# Altium PCB 核心板.PcbDoc
Units mil, origin at the board's own origin, x right, y up, seen from the top; angles counter-clockwise.
Board outline 6000 x 4000 mil, 2 copper layers (Top Layer, Bottom Layer); 30 components, 44 nets, 174 pads, 0 vias.
Unrouted connection lines stored in the file: 1.
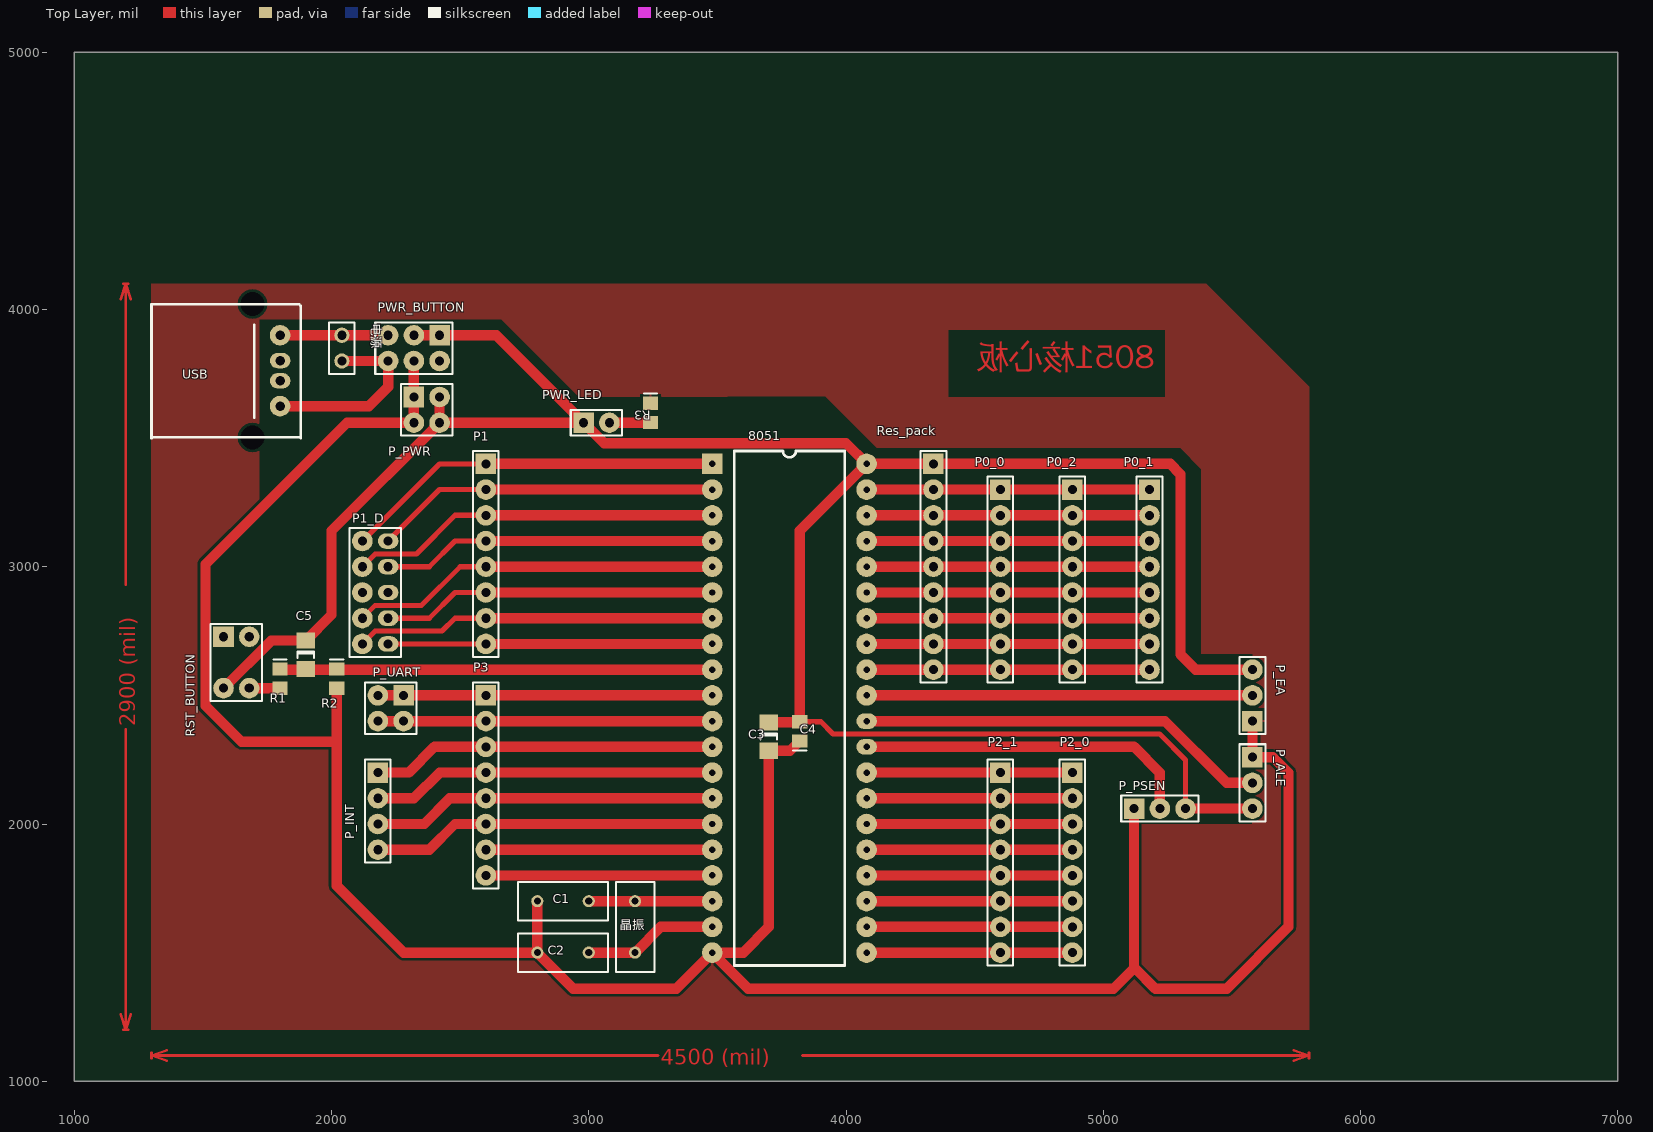
[diagram p0: Top Layer view]
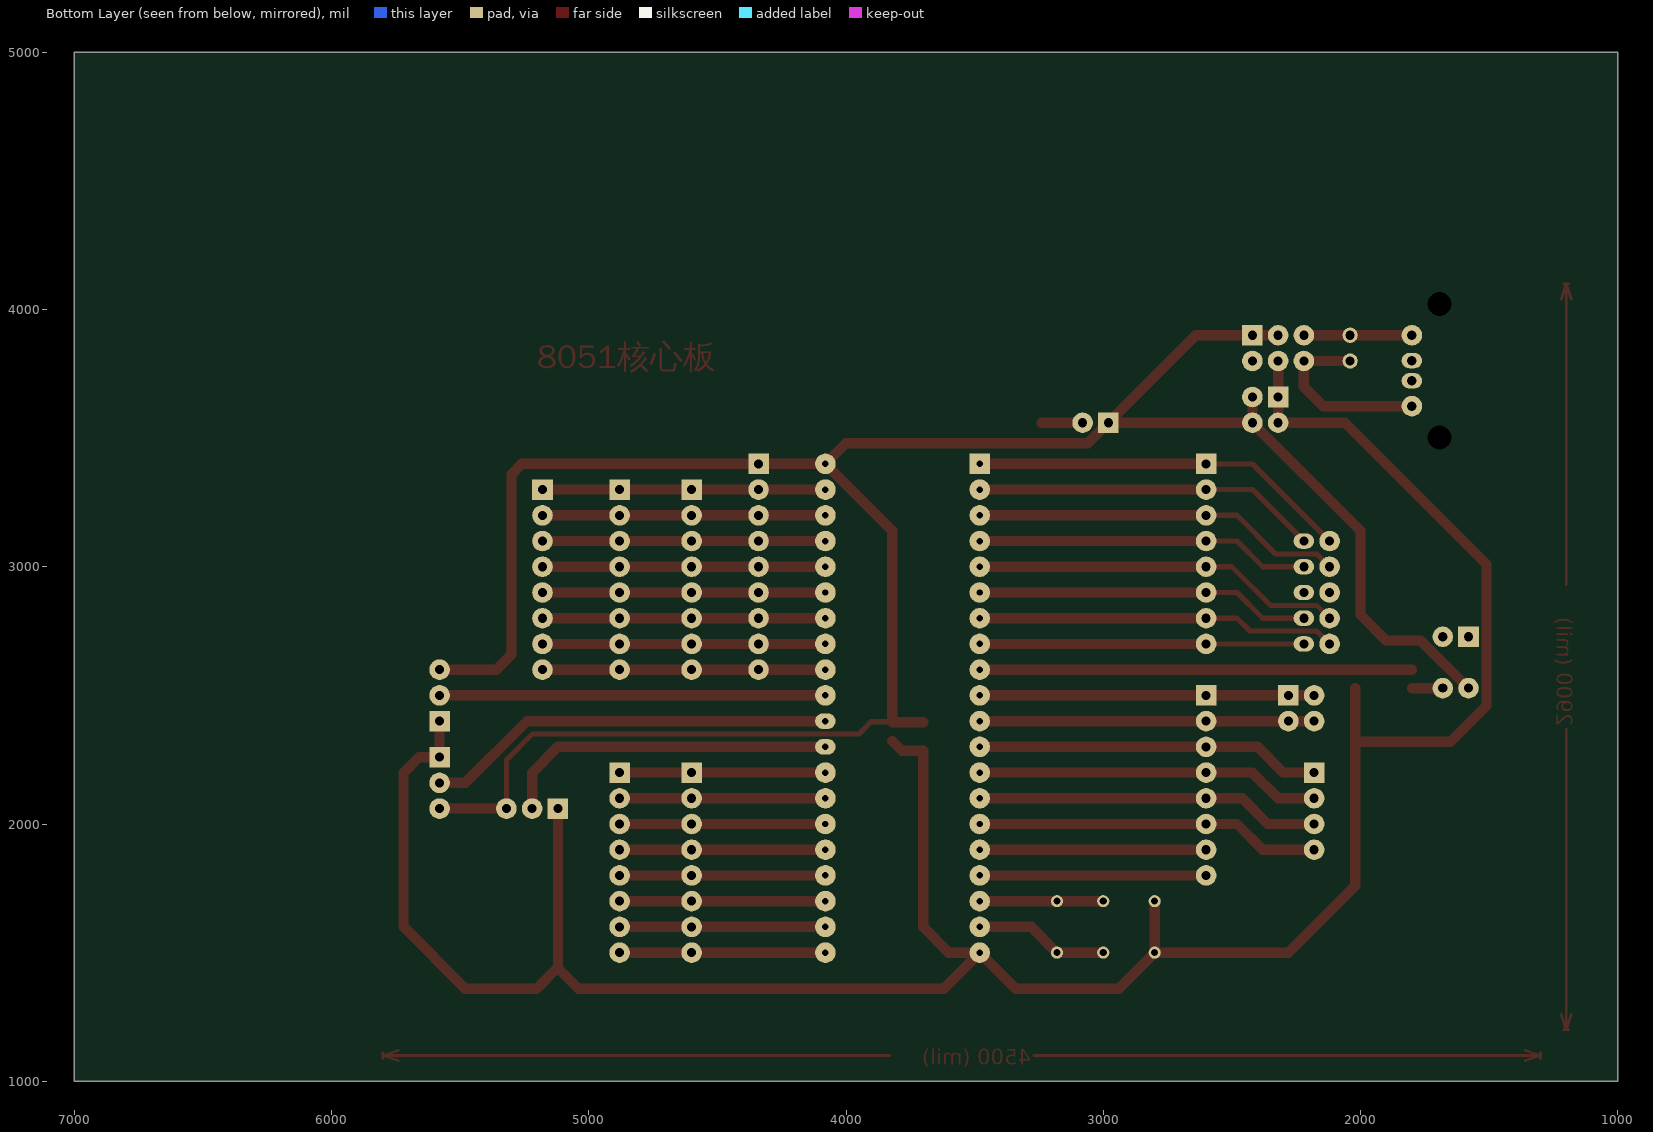
[diagram p1: Bottom Layer view, seen from below]

## Layer stack, top to bottom
Top Layer: signal copper 1.4
Dielectric: dielectric 12.6, FR-4, Dk 4.8
Bottom Layer: signal copper 1.4

## Board outline
1000,1000 7000,1000 7000,5000 1000,5000

## Design rules (kind name [scope] priority, off if disabled: settings)
Clearance [All] p1: gap=10
PolygonConnect [All] p1: connectstyle=Relief reliefconductorwidth=10 reliefentries=4 polygonreliefangle="90 Angle"
RoutingVias [All] p1: holewidth=28 width=50 viastyle="Through Hole" minholewidth=28 minwidth=50 maxholewidth=28 maxwidth=50
SilkToSilkClearance [All] p1 off: silktosilkclearance=10
SilkscreenOverComponentPads [All] p1 off: minsilkscreentomaskgap=10
SolderMaskExpansion [All] p1: expansion=4
TestPointUsage [All] p1: valid=0 allowmultiple=FALSE
Testpoint [All] p1: side=15 testpointundercomponent=TRUE minsize=40 maxsize=100 preferedsize=60 minholesize=0 maxholesize=40 preferedholesize=32 testpointgrid=1 style=1023 order=0-112345678
Width [All] p1: maxlimit=50 minlimit=20 preferedwidth=40
22 further rules are at their usual default settings.

## Components (designator, comment, footprint, x,y, rotation, side; value= is the part's Value field where it differs from the comment)
8051 "8051" DIP-40 3480,3400 r0 top
C1 "Cap" RAD-0.2 2900,1700 r180 top
C2 "Cap" rad-0.2 2900,1500 r180 top
C3 "Cap Pol1" C1206 3700,2340 r270 top
C4 "Cap" C0805 3820,2360 r90 top
C5 "Cap Pol1" C1206 1900,2658 r270 top
P0_0 "Header 8" HDR1X8 4600,3300 r270 top
P0_1 "Header 8" HDR1X8 5180,3300 r270 top
P0_2 "Header 8" HDR1X8 4880,3300 r270 top
P1 "Header 8" HDR1X8 2600,3400 r270 top
P1_D "Header 5X2" HDR2X5 2120,3100 r270 top
P2_0 "Header 8" HDR1X8 4880,2200 r270 top
P2_1 "Header 8" HDR1X8 4600,2200 r270 top
P3 "Header 8" HDR1X8 2600,2500 r270 top
P_ALE "Header 3" HDR1X3 5580,2260 r270 top
P_EA "Header 3" HDR1X3 5580,2400 r90 top
P_INT "Header 4" HDR1X4 2180,2200 r270 top
P_PSEN "Header 3" HDR1X3 5120,2060 r0 top
P_PWR "Header 2X2" HDR2X2 2320,3660 r270 top
P_UART "Header 2X2" HDR2X2 2280,2500 r180 top
PWR_BUTTON "双刀双掷按钮" HDR2x3#1 2420,3900 r180 top
PWR_LED "LED0" HDR1X2#1 2980,3560 r0 top
R1 "Res2" C0805 1800,2565 r270 top
R2 "Res2" C0805 2020,2565 r270 top
R3 "Res2" C0805 3240,3598 r270 top
Res_pack "Header 9" HDR1X9 4340,3400 r270 top
RST_BUTTON "双刀双掷按钮" HDR2x3#2 1580,2728 r270 top
USB "USB" USB-A 1800,3900 r90 top
晶振 "XTAL" RAD-0.2 3180,1600 r90 top
电源 "Comment" HDR1X2#2 2040,3900 r270 top

## Footprints (in the part's own frame and the unit in brackets; to place one, negate y for a bottom-side part, rotate by r counter-clockwise, add the part's x,y. Pads: shape width x height; smd on the part's side, far side on the other; paste and mask are expansions set on the pad)
C0805 [mm] "Chip Capacitor; Body 2.0 x 1.2 mm (LxW typ)"
  rect 1.3x1.5 smd: 1(-0.95,0) 2(0.95,0)
  silkscreen extent -1.9,-0.65 -1.9,0.65
C1206 [mm] "Chip Capacitor; Body 3.2 x 1.6 mm (LxW typ)"
  rect 1.6x1.8 smd: 1(-1.4,0) 2(1.4,0)
  silkscreen extent -0.3,-0.8 0.3,0.8
DIP-40 [mil]
  rect 80x80 hole 25: 1(0,0)
  round 80 hole 25: 2(0,-100) 3(0,-200) 4(0,-300) 5(0,-400) 6(0,-500) 7(0,-600) 8(0,-700) 9(0,-800) 10(0,-900) 11(0,-1000) 12(0,-1100) 13(0,-1200) 14(0,-1300) 15(0,-1400) 16(0,-1500) 17(0,-1600) 18(0,-1700) 19(0,-1800) 20(0,-1900) 21(600,-1900) 22(600,-1800) 23(600,-1700) 24(600,-1600) 25(600,-1500) 26(600,-1400) 27(600,-1300) 28(600,-1200) 31(600,-900) 32(600,-800) 33(600,-700) 34(600,-600) 35(600,-500) 36(600,-400) 37(600,-300) 38(600,-200) 39(600,-100) 40(600,0)
  oval 80x60 hole 25: 29(600,-1100) 30(600,-1000)
  silkscreen extent 85,-1950 515,50
HDR1X2#1 [mil] "Connector; Header; 2 Position"
  rect 80x80 hole 35.43: 1(0,0)
  round 80 hole 35.43: 2(100,0)
  silkscreen extent -50,-50 150,50
HDR1X2#2 [mil] "Connector; Header; 2 Position"
  round 59.06 hole 35.43: 1(0,0) 2(100,0)
  silkscreen extent -50,-50 150,50
HDR1X3 [mil] "Connector; Header; 3 Position"
  rect 80x80 hole 35.43: 1(0,0)
  round 80 hole 35.43: 2(100,0) 3(200,0)
  silkscreen extent -50,-50 250,50
HDR1X4 [mil] "Connector; Header; 4 Position"
  rect 80x80 hole 35.43: 1(0,0)
  round 80 hole 35.43: 2(100,0) 3(200,0) 4(300,0)
  silkscreen extent -50,-50 350,50
HDR1X8 [mil] "Connector; Header; 8 Position"
  rect 80x80 hole 35.43: 1(0,0)
  round 80 hole 35.43: 2(100,0) 3(200,0) 4(300,0) 5(400,0) 6(500,0) 7(600,0) 8(700,0)
  silkscreen extent -50,-50 750,50
HDR1X9 [mil] "Connector; Header; 9 Position"
  rect 80x80 hole 35.43: 1(0,0)
  round 80 hole 35.43: 2(100,0) 3(200,0) 4(300,0) 5(400,0) 6(500,0) 7(600,0) 8(700,0) 9(800,0)
  silkscreen extent -50,-50 850,50
HDR2X2 [mil] "Connector; Header; 2x2 Position"
  rect 80x80 hole 35.43: 1(0,0)
  round 80 hole 35.43: 2(0,100) 3(100,0) 4(100,100)
  silkscreen extent -50,-50 150,150
HDR2x3#1 [mil] "Connector; Header; 3x2 Position"
  rect 80x80 hole 35.43: 1(0,0)
  round 80 hole 35.43: 2(0,100) 3(100,0) 4(100,100) 5(200,0) 6(200,100)
  silkscreen extent -50,-50 250,150
HDR2x3#2 [mil] "Connector; Header; 3x2 Position"
  rect 80x80 hole 35.43: 1(0,0)
  round 80 hole 35.43: 2(0,100) 5(200,0) 6(200,100)
  silkscreen extent -50,-50 250,150
HDR2X5 [mil] "Connector; Header; 5x2 Position"
  round 80 hole 35.43: 1(0,0) 3(100,0) 5(200,0) 7(300,0) 9(400,0)
  oval 60x80 hole 35.43: 2(0,100) 4(100,100) 6(200,100) 8(300,100) 10(400,100)
  silkscreen extent -50,-50 450,150
RAD-0.2 [mm] "Jumper Wire; 2 Leads"
  round 1.2 hole 0.7: 1(-2.54,0) 2(2.54,0)
  silkscreen extent -4.44,-1.91 4.44,1.91
rad-0.2 [mm] "Jumper Wire; 2 Leads"
  round 1.2 hole 0.7: 1(-2.54,0) 2(2.54,0)
  silkscreen extent -4.44,-1.91 4.44,1.91
USB-A [mil] "扁头USB封装"
  round 80 hole 37: 1(0,0) 4(-275.6,0)
  oval 60x80 hole 37: 2(-98.5,0) 3(-177,0)
  round 80 hole 93: 5(-397,107) 6(121,107)
  silkscreen extent -400,-80 121,500

## Part data
C1 C2 C4: "Capacitor"
C3 C5: "Polarized Capacitor (Radial)"
P0_0 P0_1 P0_2 P1 P2_0 P2_1 P3: "Header, 8-Pin"
P1_D: "Header, 5-Pin, Dual row"
P_ALE P_EA P_PSEN: "Header, 3-Pin"
P_INT: "Header, 4-Pin"
P_PWR: "Header, 2-Pin, Dual row"
P_UART: library part "Header 2x2", "Header, 2-Pin, Dual row"
PWR_LED: "Typical INFRARED GaAs LED"
R1 R2 R3: "Resistor"
Res_pack: "Header, 9-Pin"
晶振: "Crystal Oscillator"

## Nets (pads, with @x,y where several pads share a name; then routed paths per layer and width w, separated by ;. In a path a pad name is that pad's centre, name@x,y a point inside that pad or via, vN(x,y) a via of type N, cw(c..) or ccw(c..) an arc to the next point about the centre after c; other vN are vias at no path point)
GND: 8051.20 C1.2 C2.2 C3.2 C4.1 P_ALE.1 P_EA.1 P_PSEN.1 P_PWR.1 P_PWR.3 PWR_BUTTON.2 PWR_BUTTON.4 R2.2 R3.1 | length 10279.9
  Top Layer w40: R2.2 2020,2320 ; PWR_BUTTON.4 P_PWR.1 P_PWR.3 2060,3560 1510,3010 1510,2460 1650,2320 2020,2320 ; C1.2 C2.2 ; 8051.20@3477.99,1500 3600,1500 ; 3740,1360 3780,1360 ; C4.1 3782.28,2284.88 C3.2 3700,1600 3600,1500 ; P_PSEN.1 5120,1442.91 5121.46,1441.46 ; P_EA.1 P_ALE.1 5660,2260 5720,2200 5720,1600 5480,1360 5202.91,1360 5121.46,1441.46 ; 2020,2320 2020,1760 2280,1500 C2.2 ; C2.2 2940,1360 3340,1360 8051.20 ; 8051.20 3600,1500 ; 8051.20 3620,1360 3780,1360 ; 3780,1360 5040,1360 5121.46,1441.46
Net8051_1: 8051.1 P1.1 P1_D.1 | length 1484.3
  Top Layer w20: P1_D.1 2200,3180 2420,3400 2500,3400 P1.1
  Top Layer w40: P1.1 8051.1
Net8051_2: 8051.2 P1.2 P1_D.2 | length 1342.8
  Top Layer w20: P1_D.2 2420,3300 P1.2
  Top Layer w40: P1.2 8051.2
Net8051_3: 8051.3 P1.3 P1_D.3 | length 1472.8
  Top Layer w15: P1_D.3 P1_D.3@2124.75,3000
  Top Layer w20: P1_D.3 2170,3050 2200,3050 ; 2174.75,3050 2200,3050 ; P1.3 2480,3200 2330,3050 2200,3050
  Top Layer w40: P1.3 8051.3
Net8051_4: 8051.4 P1.4 P1_D.4 | length 1301.4
  Top Layer w20: P1_D.4 2380,3000 2480,3100 P1.4
  Top Layer w40: P1.4 8051.4
Net8051_5: 8051.5 P1.5 P1_D.7 | length 1442.8
  Top Layer w20: P1_D.7 2170,2850 2350,2850 2500,3000 P1.5
  Top Layer w40: P1.5 8051.5
Net8051_6: 8051.6 P1.6 P1_D.8 | length 1301.4
  Top Layer w20: P1_D.8 2380,2800 2480,2900 P1.6
  Top Layer w40: P1.6 8051.6
Net8051_7: 8051.7 P1.7 P1_D.9 | length 1401.4
  Top Layer w20: P1_D.9 2170,2750 2430,2750 2480,2800 P1.7
  Top Layer w40: P1.7 8051.7
Net8051_8: 8051.8 P1.8 P1_D.10 | length 1260
  Top Layer w20: P1_D.10 P1.8
  Top Layer w40: P1.8 8051.8
Net8051_9: 8051.9 C5.2 R1.1 R2.1 | length 1680
  Top Layer w40: R1.1@1800,2600 8051.9
Net8051_10: 8051.10 P3.1 P_UART.1 P_UART.3 | length 1300
  Top Layer w40: P_UART.3 P_UART.1 8051.10
Net8051_11: 8051.11 P3.2 P_UART.2 P_UART.4 | length 1300
  Top Layer w40: P_UART.4 P_UART.2 8051.11
Net8051_12: 8051.12 P3.3 P_INT.1 | length 1341.4
  Top Layer w40: P_INT.1 2300,2200 2400,2300 8051.12
Net8051_13: 8051.13 P3.4 P_INT.2 | length 1341.4
  Top Layer w40: P_INT.2 2320,2100 2420,2200 8051.13
Net8051_14: 8051.14 P3.5 P_INT.3 | length 1341.4
  Top Layer w40: P_INT.3 2360,2000 2460,2100 8051.14
Net8051_15: 8051.15 P3.6 P_INT.4 | length 1341.4
  Top Layer w40: P_INT.4 2380,1900 2480,2000 8051.15
Net8051_16: 8051.16 P3.7 | length 880
  Top Layer w40: P3.7 8051.16
Net8051_17: 8051.17 P3.8 | length 880
  Top Layer w40: P3.8 8051.17
Net8051_18: 8051.18 C1.1 晶振.2 | length 480
  Top Layer w40: C1.1 8051.18
Net8051_19: 8051.19 C2.1 晶振.1 | length 521.4
  Top Layer w40: C2.1 晶振.1 3280,1600 8051.19
Net8051_21: 8051.21 P2_0.8 P2_1.8 | length 800
  Top Layer w40: 8051.21 P2_1.8 P2_0.8
Net8051_22: 8051.22 P2_0.7 P2_1.7 | length 800
  Top Layer w40: 8051.22 P2_1.7 P2_0.7
Net8051_23: 8051.23 P2_0.6 P2_1.6 | length 800
  Top Layer w40: 8051.23 P2_1.6 P2_0.6
Net8051_24: 8051.24 P2_0.5 P2_1.5 | length 800
  Top Layer w40: 8051.24 P2_1.5 P2_0.5
Net8051_25: 8051.25 P2_0.4 P2_1.4 | length 800
  Top Layer w40: 8051.25 P2_1.4 P2_0.4
Net8051_26: 8051.26 P2_0.3 P2_1.3 | length 800
  Top Layer w40: 8051.26 P2_1.3 P2_0.3
Net8051_27: 8051.27 P2_0.2 P2_1.2 | length 800
  Top Layer w40: 8051.27 P2_1.2 P2_0.2
Net8051_28: 8051.28 P2_0.1 P2_1.1 | length 800
  Top Layer w40: 8051.28 P2_1.1 P2_0.1
Net8051_29: 8051.29 P_PSEN.2 | length 1321.4
  Top Layer w40: 8051.29 5120,2300 5220,2200 P_PSEN.2
Net8051_30: 8051.30 P_ALE.2 | length 1599.4
  Top Layer w40: 8051.30 5240,2400 5480,2160 P_ALE.2
Net8051_31: 8051.31 P_EA.2 | length 1500
  Top Layer w40: 8051.31 P_EA.2
Net8051_32: 8051.32 P0_0.8 P0_1.8 P0_2.8 Res_pack.9 | length 1100
  Top Layer w40: 8051.32 Res_pack.9 P0_0.8 P0_2.8 P0_1.8
Net8051_33: 8051.33 P0_0.7 P0_1.7 P0_2.7 Res_pack.8 | length 1100
  Top Layer w40: 8051.33 Res_pack.8 P0_0.7 P0_2.7 P0_1.7
Net8051_34: 8051.34 P0_0.6 P0_1.6 P0_2.6 Res_pack.7 | length 1100
  Top Layer w40: 8051.34 Res_pack.7 P0_0.6 P0_2.6 P0_1.6
Net8051_35: 8051.35 P0_0.5 P0_1.5 P0_2.5 Res_pack.6 | length 1100
  Top Layer w40: 8051.35 Res_pack.6 P0_0.5 P0_2.5 P0_1.5
Net8051_36: 8051.36 P0_0.4 P0_1.4 P0_2.4 Res_pack.5 | length 1100
  Top Layer w40: 8051.36 Res_pack.5 P0_0.4 P0_2.4 P0_1.4
Net8051_37: 8051.37 P0_0.3 P0_1.3 P0_2.3 Res_pack.4 | length 1100
  Top Layer w40: 8051.37 Res_pack.4 P0_0.3 P0_2.3 P0_1.3
Net8051_38: 8051.38 P0_0.2 P0_1.2 P0_2.2 Res_pack.3 | length 1100
  Top Layer w40: 8051.38 Res_pack.3 P0_0.2 P0_2.2 P0_1.2
Net8051_39: 8051.39 P0_0.1 P0_1.1 P0_2.1 Res_pack.2 | length 1100
  Top Layer w40: 8051.39 Res_pack.2 P0_0.1 P0_2.1 P0_1.1
NetP_PWR_1: PWR_BUTTON.6 USB.4 电源.2 | length 731.3
  Top Layer w40: USB.4 2144.4,3624.4 2220,3700 PWR_BUTTON.6 电源.2
NetP_PWR_2: PWR_BUTTON.5 USB.1 电源.1 | length 420
  Top Layer w40: USB.1 PWR_BUTTON.5
NetPWR_LED_2: PWR_LED.2 R3.2 | length 160.2
  Top Layer w40: PWR_LED.2 3239.4,3560 R3.2
NetR1_2: R1.2 RST_BUTTON.6 | length 120.2
  Top Layer w40: RST_BUTTON.6 1799.6,2528 R1.2
VCC: 8051.40 C3.1 C4.2 C5.1 P_ALE.3 P_EA.3 P_PSEN.3 P_PWR.2 P_PWR.4 PWR_BUTTON.1 PWR_BUTTON.3 PWR_LED.1 Res_pack.1 RST_BUTTON.5 | length 9569.4
  Top Layer w20: C4.2 3902.6,2397.4 3950,2350 5219.29,2350 5320,2249.29 P_PSEN.3
  Top Layer w40: RST_BUTTON.5 1765.12,2713.12 C5.1 2000,2813.12 2000,3140 P_PWR.4 ; PWR_BUTTON.3 PWR_BUTTON.1 2640,3900 PWR_LED.1 ; P_PWR.2 P_PWR.4 ; C3.1 3817.72,2395.12 C4.2 3820,3140 8051.40 ; P_PSEN.3 P_ALE.3 ; P_EA.3 5360,2600 5300,2660 5300,3360 5260,3400 Res_pack.1 8051.40 ; P_PWR.4 PWR_LED.1 ; PWR_LED.1 3060,3480 4000,3480 8051.40
pads on no net: P1_D.5 P1_D.6 RST_BUTTON.1 RST_BUTTON.2 USB.2 USB.3 USB.5 USB.6
copper on no net: | length 6862.3
  Top Layer w10: 1180,1260 1200,1200 ; 1180,4040 1200,4100 ; 1190,1200 1210,1200 ; 1190,4100 1210,4100 ; 1200,2369.09 1200,1200 ; 1200,2930.91 1200,4100 ; 1220,1260 1200,1200 ; 1220,4040 1200,4100 ; 1300,1090 1300,1110 ; 1360,1080 1300,1100 ; 1360,1120 1300,1100 ; 3269.09,1100 1300,1100 ; 3830.91,1100 5800,1100 ; 5740,1080 5800,1100 ; 5740,1120 5800,1100 ; 5800,1090 5800,1110

## Polygon pours and split planes (outlines as drawn)
GND on Top Layer "Top Layer-No Net" (solid, pour order 1000): 1300,1200 5800,1200 5800,3700 5400,4100 1300,4100

## Other copper
Top Layer:
  pour cut-out: 1720,3960 1720,3240 1510,3010 1510,2460 1650,2320 2040,2320 2040,1760 2280,1520 2800,1520 2960,1360 3340,1360 3480,1500 3620,1360 5020,1360 5120,1460 5120,2000 5580,2000 5580,2660 5380,2660 5380,3380 5300,3460 4120,3460 3920,3660 3540,3660 3042.17,3659.23 2960,3660 2660,3960
  pour cut-out: 4400,3660 4400,3920 5240,3920 5240,3660
  text "8051核心板" at 5200,3740 h160
  text "2900 (mil)" at 1235.99,2379.09 h60 r90
  text "4500 (mil)" at 3279.09,1064.01 h60